# Altium PCB SeniorDesign.PcbDoc (part 2 of 2)
Units mil, origin at the board's own origin, x right, y up, seen from the top; angles counter-clockwise.
Board outline 3586 x 2237 mil, 4 copper layers (Top Layer, GND, PWR, Bottom Layer), stack 30.634 mil thick; 184 components, 148 nets, 619 pads, 132 vias.
Unrouted connection lines stored in the file: 8.
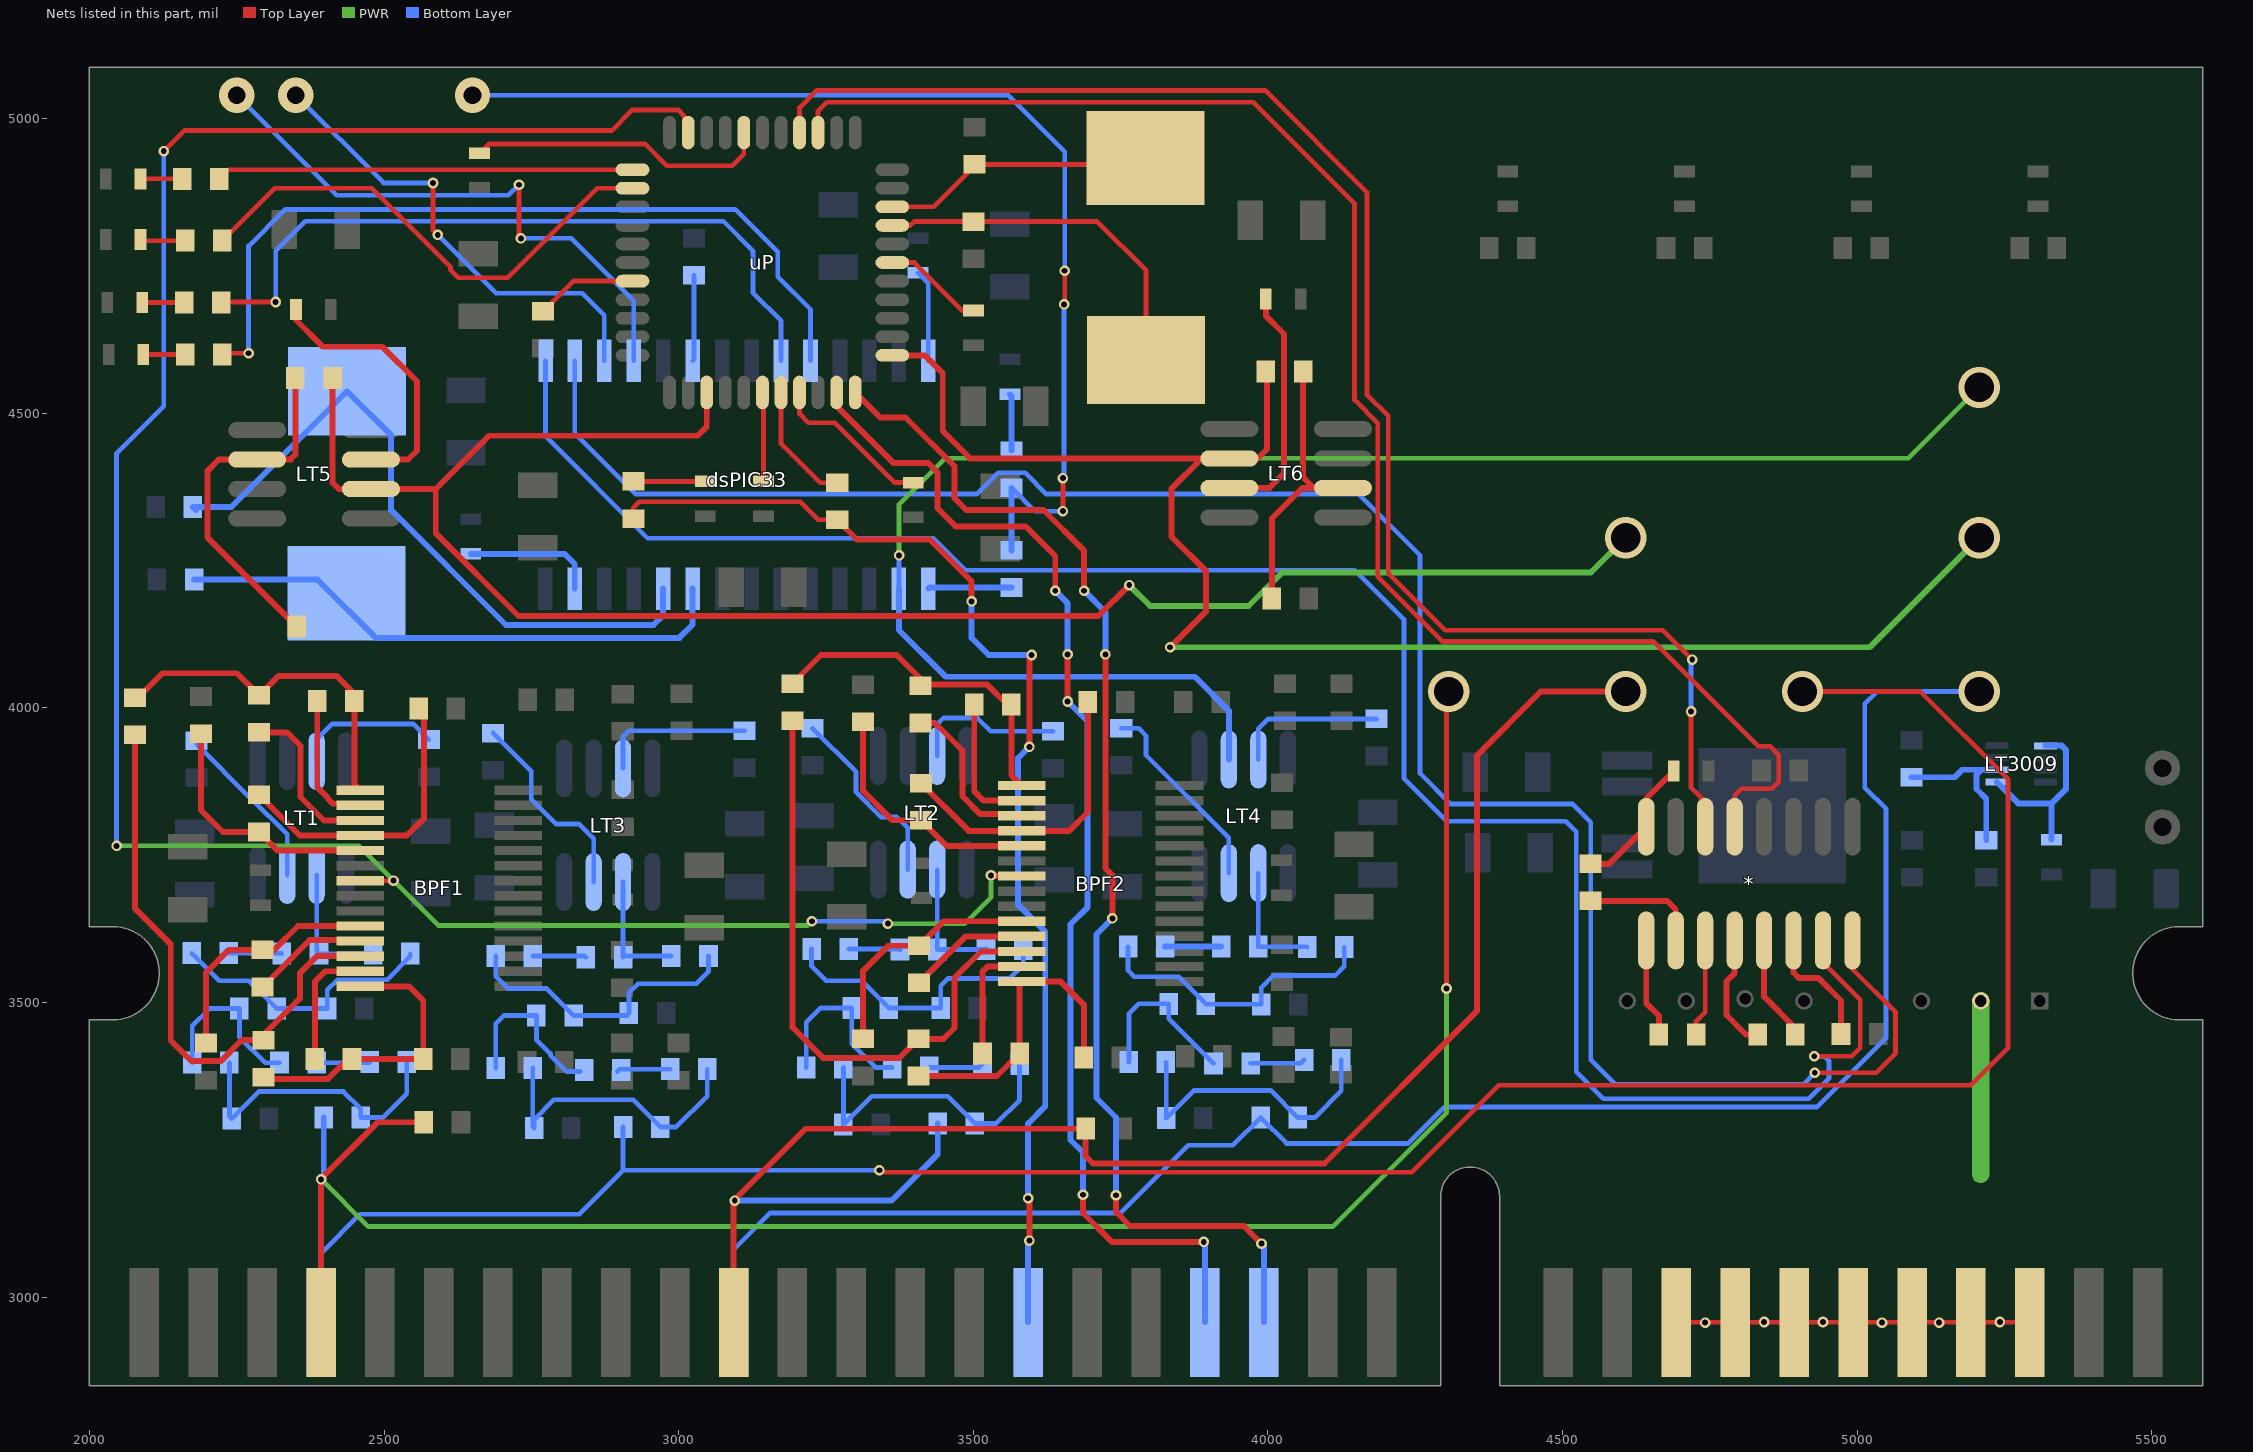
[diagram p4: the nets of this part, all layers, seen from the top]

## Via types
v1: diameter 18, hole 10, Top Layer to Bottom Layer, 107 vias
v2: diameter 70, hole 50, Top Layer to Bottom Layer, 20 vias
v3: diameter 60, hole 30, Top Layer to Bottom Layer, 5 vias

## Nets (pads, with @x,y where several pads share a name; then routed paths per layer and width w, separated by ;. In a path a pad name is that pad's centre, name@x,y a point inside that pad or via, vN(x,y) a via of type N, cw(c..) or ccw(c..) an arc to the next point about the centre after c; other vN are vias at no path point) (continued)
H4FILTEROUT: dsPIC33.2 LT4.6 | length 2828.3
  PWR w8: v1(3374,4259) 3374,4346 3452,4424 5087,4424 v2(5207,4544)
  Bottom Layer w8: dsPIC33.2@3373.62,4202.5 3374,4202.88 v1(3374,4259)
  Bottom Layer w10: dsPIC33.2@3373.62,4202.5 3373.62,4132.38 3453,4053 3876,4053 3933.59,3995.41 LT4.6@3933.59,3912.59
HYDROPHONE1: C14.2 pad.4 R37.1 | length 3304.4
  Top Layer w8: v1(4303,3524) 4303,4024 v2(4307,4028)
  Top Layer w10: pad.4@2393,2957.5 v1(2393,3200) 2393,3201 2489,3297 R37.1@2567.5,3297
  PWR w8: v1(2393,3200) 2473,3120 4110,3120 4303,3313 v1(4303,3524)
  Bottom Layer w10: v1(2393,3200) 2397.5,3204.5 C14.2@2397.5,3305
HYDROPHONE2: C21.2 pad.11 R40.1 | length 2838.2
  Top Layer w10: pad.11@3093,2957.5 3093,3164 3215,3286 R40.1@3690.5,3286 3690.5,3239.5 3703,3227 4096,3227 4355,3486 4355,3920 4463,4028 v2(4607,4028)
  Bottom Layer w10: v1(3095,3164) 3361,3164 3439.5,3242.5 C21.2@3439.5,3295
HYDROPHONE3: C28.2 pad.67 | length 4067.8
  Top Layer w8: v1(3340.5,3215.5) 3344,3212 4244,3212 4392,3360 5193,3360 5256,3423 5256,3879 5107,4028 v2(4907,4028)
  Bottom Layer w8: pad.67@2393,2957.5 2393,3075 2459,3141 2831,3141 2905.5,3215.5 ; C28.2@2905.5,3289 2905.5,3215.5 ; v1(3340.5,3215.5) 2905.5,3215.5
HYDROPHONE4: C35.2 pad.60 | length 3049.3
  Bottom Layer w8: pad.60@3093,2957.5 3093,3081 3155,3143 3750,3143 3865,3258 3940.5,3258 C35.2@3987.5,3305 4031.5,3261 4238,3261 4300,3323 4932,3323 5049,3440 5049,3829 5013,3865 5013,4007 5034,4028 v2(5207,4028)
"MCLR B_(DSPIC)": B2.1 R1.2 | length 97.2
  Bottom Layer w10: B2.1@3562,4532.47 3565,4529.47 R1.2@3565,4436.5
"MCLR B_PICK24": B13.1 R25.2 | length 122
  Top Layer w8: R25.2@2923,4384.5 B13.1@3045,4384.53
Net*_1: *.1 C3.1 | length 168.5
  Top Layer w10: *.1@4642,3605.54 4642,3499 4663.5,3477.5 C3.1@4663.5,3446
Net*_2: *.2 C1.1 | length 203.5
  Top Layer w10: C1.1@4547,3672.5 4677.5,3672.5 4692,3658 *.2@4692,3605.54
Net*_3: *.3 C3.2 | length 166
  Top Layer w8: C3.2@4726.5,3446 4726.5,3468.5 4742,3484 *.3@4742,3605.54
Net*_4: *.4 C4.1 | length 199.5
  Top Layer w10: *.4@4792,3605.54 4792,3550 4778,3536 4778,3479 4811,3446 C4.1@4831.5,3446
Net*_5: *.5 C4.2 | length 181.3
  Top Layer w10: *.5@4842,3605.54 4842,3510 4894.5,3457.5 C4.2@4894.5,3446
Net*_6: *.6 C5.2 | length 211.2
  Top Layer w10: *.6@4892,3605.54 4892,3551 4901,3542 4934,3542 4972.5,3503.5 C5.2@4972.5,3447
NetB3_2: B3.2 dsPIC33.28 | length 156.7
  Bottom Layer w8: B3.2@3406,4738.47 3423.62,4720.85 dsPIC33.28@3423.62,4589.12
NetB4_2: B4.2 dsPIC33.13 | length 225.6
  Bottom Layer w10: B4.2@2647,4261.47 2806.53,4261.47 2823.62,4244.38 dsPIC33.13@2823.62,4202.5
NetB5_2: B5.2 LT1.7 | length 249.3
  Bottom Layer w8: LT1.7@2385.59,3909.59 2385.59,3946.59 2412,3973 2549.5,3973 B5.2@2576,3946.5
NetB6_2: B6.2 LT1.3 | length 291.8
  Bottom Layer w8: B6.2@2182,3944.5 2182,3938.46 2274.08,3846.38 2274.62,3846.38 2335.59,3785.41 LT1.3@2335.59,3716.68
NetB7_2: B7.2 LT2.7 | length 264
  Bottom Layer w8: LT2.7@3438.59,3918.59 3438.59,3972.59 3449,3983 3507,3983 3529.5,3960.5 B7.2@3635,3960.5
NetB8_2: B8.2 LT2.3 | length 322.6
  Bottom Layer w8: B8.2@3227,3965.5 3301,3891.5 3301,3857 3343,3815 3370,3815 3388.59,3796.41 LT2.3@3388.59,3725.68
NetB9_2: B9.2 LT3.7 | length 264.5
  Bottom Layer w8: LT3.7@2905.59,3897.59 2905.59,3951.59 2915.5,3961.5 B9.2@3112,3961.5
NetB10_2: B10.2 LT3.3 | length 346.3
  Bottom Layer w8: B10.2@2685,3957.5 2749.5,3893 2749.5,3845.5 2792,3803 2831,3803 2855.59,3778.41 LT3.3@2855.59,3704.68
NetB11_2: B11.2 LT4.7 | length 259.4
  Bottom Layer w8: LT4.7@3983.59,3912.59 3983.59,3964.59 4000.5,3981.5 B11.2@4184,3981.5
NetB12_2: B12.2 LT4.3 | length 338.7
  Bottom Layer w8: B12.2@3751,3965.5 3780.5,3965.5 3793,3953 3793,3920 3933.59,3779.41 LT4.3@3933.59,3719.68
NetB22_2: B22.2 LT5.7 | length 468.1
  Top Layer w10: B22.2@2350.47,4676 2350.47,4658.53 2396,4613 2497,4613 2556,4554 2556,4437 2540.59,4421.59 LT5.7@2477.59,4421.59
NetB23_2: B23.2 LT6.7 | length 411.6
  Top Layer w10: LT6.7@3934.41,4373.41 4002.41,4373.41 4027.25,4398.25 4027.25,4634.75 3996.47,4665.53 B23.2@3996.47,4694
NetB24_2: B24.2 LT3009.1 LT3009.5 | length 308
  Bottom Layer w10: LT3009.5@5237.06,3874.25 5273.16,3838.15 5330,3838.15 ; LT3009.1@5319.34,3936.14 5346.86,3936.14 5354.02,3928.98 5354.02,3862.17 5330,3838.15 ; B24.2@5330,3776.53 5330,3838.15
NetBPF1_15: BPF1.15 R31.2 R60.2 R64.2 | length 599.3
  Top Layer w10: R31.2@2077,4017.5 2082.5,4017.5 2124,4059 2250.5,4059 R60.2@2288,4021.5 2320.5,4054 2420,4054 2449.5,4024.5 R64.2@2449.5,4012 2449.5,3870.51 BPF1.15@2459.67,3860.34
NetBPF1_16: BPF1.16 R64.1 | length 233.2
  Top Layer w10: R64.1@2386.5,4012 2386.5,3865.5 2404.32,3847.68 2404.32,3846.25 2413.1,3837.46 2456.95,3837.46 BPF1.16@2459.67,3834.75
NetBPF1_17: BPF1.17 R60.1 | length 284.5
  Top Layer w10: R60.1@2288,3958.5 2335.5,3958.5 2358,3936 2358,3849 2397.84,3809.16 BPF1.17@2459.67,3809.16
NetBPF1_18: BPF1.18 R55.2 R67.2 | length 510.7
  Top Layer w10: R55.2@2288,3852.5 2356.93,3783.57 BPF1.18@2459.67,3783.57 2538.57,3783.57 2568,3813 2568,3989.5 R67.2@2558.5,3999
NetBPF1_19: BPF1.19 R53.1 R55.1 | length 428.8
  Top Layer w10: R53.1@2189,3956.5 2189,3827 2226.5,3789.5 R55.1@2288,3789.5 2319.53,3757.98 BPF1.19@2459.67,3757.98
NetBPF1_24: BPF1.24 R44.2 R48.1 | length 413.9
  Top Layer w10: R48.1@2198,3431.5 2198,3551 2236.5,3589.5 R44.2@2294,3589.5 2313.5,3589.5 2354.02,3630.02 BPF1.24@2459.67,3630.02
NetBPF1_25: BPF1.25 R44.1 | length 199.2
  Top Layer w10: R44.1@2294,3526.5 2373.5,3606 2458.1,3606 BPF1.25@2459.67,3604.43
NetBPF1_26: BPF1.26 R31.1 R39.1 | length 984.1
  Top Layer w10: R31.1@2077,3954.5 2077,3660 2138,3599 2138,3435.83 2173.09,3400.75 2222.91,3400.75 2258.66,3436.5 R39.1@2295,3436.5 2295,3445 2357,3507 2357,3550 2385.84,3578.84 BPF1.26@2459.67,3578.84
NetBPF1_27: BPF1.27 R34.1 | length 216
  Top Layer w10: R34.1@2382.5,3404 2382.5,3535.5 2400.25,3553.25 BPF1.27@2459.67,3553.25
NetBPF1_28: BPF1.28 R29.2 R34.2 R39.2 | length 503.1
  Top Layer w10: R39.2@2295,3373.5 2298.2,3370.3 2404.47,3370.3 2438.17,3404 R34.2@2445.5,3404 R29.2@2566.5,3404 2566.5,3503.5 2542.34,3527.66 BPF1.28@2459.67,3527.66
NetBPF2_15: BPF2.15 R32.2 R62.2 R66.2 | length 580.5
  Top Layer w10: R32.2@3193,4041.5 3241.5,4090 3370,4090 3410,4050 R62.2@3410,4037.5 3412.21,4039.7 3523.46,4039.7 3557.17,4006 R66.2@3564.5,4006 3564.5,3885.99 BPF2.15@3582.14,3868.34
NetBPF2_16: BPF2.16 R66.1 | length 234.7
  Top Layer w10: R66.1@3501.5,4006 3501.5,3858.5 3517.25,3842.75 BPF2.16@3582.14,3842.75
NetBPF2_17: BPF2.17 R62.1 | length 282.9
  Top Layer w10: R62.1@3410,3974.5 3435,3974.5 3481.5,3928 3481.5,3850.21 3511.84,3819.87 3579.43,3819.87 BPF2.17@3582.14,3817.16
NetBPF2_18: BPF2.18 R56.2 R68.2 | length 516.7
  Top Layer w10: R56.2@3411,3872.5 3491.93,3791.57 BPF2.18@3582.14,3791.57 3662.57,3791.57 3694.5,3823.5 R68.2@3694.5,4010
NetBPF2_19: BPF2.19 R54.1 R56.1 | length 425.2
  Top Layer w10: R54.1@3313,3976.5 3313,3859 3362.5,3809.5 R56.1@3411,3809.5 3454.53,3765.98 BPF2.19@3582.14,3765.98
NetBPF2_24: BPF2.24 R46.2 R50.1 | length 419.4
  Top Layer w10: R50.1@3313,3438.5 3313,3554 3355.5,3596.5 R46.2@3408,3596.5 3449.53,3638.02 BPF2.24@3582.14,3638.02
NetBPF2_25: BPF2.25 R46.1 | length 206.8
  Top Layer w10: R46.1@3408,3533.5 3486.93,3612.43 BPF2.25@3582.14,3612.43
NetBPF2_26: BPF2.26 R32.1 R42.1 | length 1055.9
  Top Layer w10: R32.1@3193,3978.5 3193,3458 3244.75,3406.25 3337.91,3406.25 3338.17,3406 3374.5,3406 R42.1@3407,3438.5 3449.5,3438.5 3468,3457 3468,3542 3512.84,3586.84 BPF2.26@3582.14,3586.84
NetBPF2_27: BPF2.27 R36.1 | length 208.8
  Top Layer w10: R36.1@3515.5,3414 3515.5,3552.5 3524.25,3561.25 BPF2.27@3582.14,3561.25
NetBPF2_28: BPF2.28 R30.2 R36.2 R42.2 | length 521.7
  Top Layer w10: R42.2@3407,3375.5 3540,3375.5 R36.2@3578.5,3414 3578.5,3532.02 BPF2.28@3582.14,3535.66 3648.34,3535.66 3687.5,3496.5 R30.2@3687.5,3407
NetC8_2: C8.2 dsPIC33.10 Y1.1 | length 1176.7
  Bottom Layer w10: C8.2@2180.47,4336.02 C8.2@2175.5,4341 2240.74,4341 Y1.1@2437.18,4537.44 2511.98,4462.65 2511.98,4336.02 2707,4141 2957,4141 2973.62,4157.62 dsPIC33.10@2973.62,4202.5
NetC9_2: C9.2 dsPIC33.9 Y1.2 | length 957.4
  Bottom Layer w10: C9.2@2177.5,4218 2386.97,4218 2391,4213.98 2485.98,4119 3001,4119 3023.62,4141.62 dsPIC33.9@3023.62,4202.5
NetC10_1: C10.1 dsPIC33.20 | length 146.4
  Bottom Layer w8: dsPIC33.20@3023.62,4589.12 3026,4591.5 C10.1@3026,4734.5
NetC12_1: C12.1 R6.2 | length 90.4
  Bottom Layer w8: R6.2@2385.5,3398 2474.5,3398 C12.1@2475.5,3399
NetC12_2: C12.2 C14.1 C15.2 R9.2 | length 509.7
  Bottom Layer w8: C15.2@2237.5,3398 2237.5,3307.01 R9.2@2241.5,3303 2287.5,3349 2431,3349 2460.5,3319.5 C14.1@2460.5,3305 2498,3305 2538.5,3345.5 C12.2@2538.5,3399
NetC13_1: C13.1 LT1.2 R8.2 | length 227.3
  Bottom Layer w8: LT1.2@2385.59,3716.68 2385.59,3586.91 C13.1@2389.5,3583 R8.2@2481.5,3583
NetC13_2: C13.2 R5.2 | length 90.4
  Bottom Layer w8: R5.2@2236.5,3584 2325.5,3584 C13.2@2326.5,3583
NetC15_1: C15.1 R6.1 R7.1 | length 289.2
  Bottom Layer w8: C15.1@2174.5,3398 2174.5,3460.5 2204,3490 R7.1@2254.5,3490 2254.5,3441.5 2298,3398 R6.1@2322.5,3398
NetC17_2: C17.2 R5.1 R7.2 R8.1 | length 469.5
  Bottom Layer w8: R5.1@2173.5,3584 2220.5,3537 2270.5,3537 R7.2@2317.5,3490 C17.2@2403.5,3490 2403.5,3521.5 2421,3539 2505,3539 2544.5,3578.5 R8.1@2544.5,3583
NetC19_1: C19.1 R11.2 | length 92.5
  Bottom Layer w8: R11.2@3425.5,3390 3509.5,3390 C19.1@3515.5,3396
NetC19_2: C19.2 C21.1 C22.2 R14.2 | length 512.8
  Bottom Layer w8: C22.2@3279.5,3390 R14.2@3279.5,3293 3327.5,3341 3456.5,3341 C21.1@3502.5,3295 3539,3295 3578.5,3334.5 C19.2@3578.5,3396
NetC20_1: C20.1 LT2.2 R13.2 | length 218.9
  Bottom Layer w8: LT2.2@3438.59,3725.68 3438.59,3590.09 3520.6,3590.09 R13.2@3521.5,3591
NetC20_2: C20.2 R10.2 | length 87.4
  Bottom Layer w8: R10.2@3288.5,3591 3374.5,3591 C20.2@3375.5,3590
NetC22_1: C22.1 R11.1 R12.1 | length 309.9
  Bottom Layer w8: C22.1@3216.5,3390 3216.5,3466.5 3241,3491 R12.1@3293.5,3491 3293.5,3430.5 3334,3390 R11.1@3362.5,3390
NetC24_2: C24.2 R10.1 R12.2 R13.1 | length 497.2
  Bottom Layer w8: R10.1@3225.5,3591 3225.5,3561.5 3250,3537 3310.5,3537 R12.2@3356.5,3491 C24.2@3444.5,3491 3444.5,3528.5 3457,3541 3562,3541 3584.5,3563.5 R13.1@3584.5,3591
NetC26_1: C26.1 R16.2 | length 91.7
  Bottom Layer w8: R16.2@2895.5,3383 2899.5,3387 C26.1@2985.5,3387
NetC26_2: C26.2 C28.1 C29.2 R19.2 | length 511.5
  Bottom Layer w8: C29.2@2752.5,3389 2752.5,3289.01 R19.2@2754.5,3287 2754.5,3301.5 2788,3335 2922.5,3335 C28.1@2968.5,3289 2996,3289 3048.5,3341.5 C26.2@3048.5,3387
NetC27_1: C27.1 LT3.2 R18.2 | length 210.6
  Bottom Layer w8: LT3.2@2905.59,3704.68 2905.5,3704.58 C27.1@2905.5,3577 2907.5,3579 R18.2@2987.5,3579
NetC27_2: C27.2 R15.2 | length 90.8
  Bottom Layer w8: R15.2@2752.5,3579 2840.5,3579 C27.2@2842.5,3577
NetC29_1: C29.1 R16.1 R17.1 | length 288.9
  Bottom Layer w8: C29.1@2689.5,3389 2689.5,3464.5 2703,3478 R17.1@2758.5,3478 2758.5,3437.24 2782.24,3413.5 2782.24,3410.76 2810,3383 R16.1@2832.5,3383
NetC31_2: C31.2 R15.1 R17.2 R18.1 | length 500.6
  Bottom Layer w8: R15.1@2689.5,3579 2689.5,3544.5 2710,3524 2775.5,3524 R17.2@2821.5,3478 2911.5,3478 C31.2@2915.5,3482 2915.5,3516.5 2931,3532 3030,3532 3050.5,3552.5 R18.1@3050.5,3579
NetC33_1: C33.1 R21.2 | length 93.5
  Bottom Layer w8: R21.2@3970.5,3397 4055.5,3397 C33.1@4061.5,3403
NetC33_2: C33.2 C35.1 C36.2 R24.2 | length 502.3
  Bottom Layer w8: C36.2@3826.5,3399 3827.5,3397.99 R24.2@3827.5,3304 3874.5,3351 4004.5,3351 C35.1@4050.5,3305 4079,3305 4124.5,3350.5 C33.2@4124.5,3403
NetC34_1: C34.1 LT4.2 R23.2 | length 208.1
  Bottom Layer w8: LT4.2@3983.59,3719.68 3983.59,3595.09 C34.1@3983.5,3595 4065.5,3595 R23.2@4066.5,3594
NetC34_2: C34.2 R20.2 | length 95
  Bottom Layer w10: R20.2@3825.5,3595 C34.2@3920.5,3595
NetC36_1: C36.1 R21.1 R22.1 | length 289.2
  Bottom Layer w8: C36.1@3763.5,3399 3764,3399.5 3764,3481 3781,3498 R22.1@3831.5,3498 3831.5,3473 R21.1@3907.5,3397
NetC38_2: C38.2 R20.1 R22.2 R23.1 | length 507.2
  Bottom Layer w8: R20.1@3762.5,3595 3762.5,3554.5 3773,3544 3848.5,3544 R22.2@3894.5,3498 3895.5,3497 C38.2@3988.5,3497 3988.5,3525.5 4009,3546 4114,3546 4129.5,3561.5 R23.1@4129.5,3594
NetC41_2: C41.2 uP.30 Y2.1 | length 619.9
  Top Layer w8: uP.30@3362.47,4818.99 3392.99,4818.99 3399.5,4825.5 C41.2@3500,4825.5 3710.48,4825.5 3793.18,4742.79 Y2.1@3793.18,4590.56
NetC42_2: C42.2 uP.31 Y2.2 | length 392.3
  Top Layer w8: uP.31@3362.47,4850.49 3432.49,4850.49 3502,4920 C42.2@3502,4922.5 3694.48,4922.5 Y2.2@3715,4943.02
NetC44_1: C44.1 uP.7 | length 172.7
  Top Layer w8: C44.1@2770,4673.5 2821.01,4724.5 uP.7@2921.53,4724.5
NetD1_1: D1.1 R3.1 | length 71
  Top Layer w8: D1.1@2091.53,4600 R3.1@2162.5,4600
NetD2_1: D2.1 R4.1 | length 71
  Top Layer w8: D2.1@2089.53,4688 R4.1@2160.5,4688
NetD3_1: D3.1 R27.1 | length 71
  Top Layer w8: D3.1@2086.53,4898 R27.1@2157.5,4898
NetD4_1: D4.1 R28.1 | length 74
  Top Layer w8: D4.1@2088.53,4793 R28.1@2162.5,4793
NetD5_1: 
NetD6_1: 
NetD7_2: 
NetD8_1: 
NetdsPIC33_1: dsPIC33.1@3423.62,4202.5 R2.2 | length 142.2
  Bottom Layer w10: dsPIC33.1@3423.62,4202.5 3425.62,4204.5 R2.2@3565,4204.5
NetdsPIC33_23: dsPIC33.23 R4.2 | length 1236.5
  Top Layer w8: R4.2@2224.5,4689 v1(2316,4689)
  Bottom Layer w8: v1(2316,4689) 2316,4776 2366,4826 3076,4826 3126,4776 3126,4705 3173.62,4657.38 dsPIC33.23@3173.62,4589.12
NetdsPIC33_24: dsPIC33.24 R3.2 | length 1388.8
  Top Layer w8: R3.2@2225.5,4600 2227.5,4602 v1(2270,4602)
  Bottom Layer w8: v1(2270,4602) 2270,4784 2332,4846 3096,4846 3168,4774 3168,4732 3223.62,4676.38 dsPIC33.24@3223.62,4589.12
NetLT5_2: LT5.2 R69.2 R70.1 | length 619.4
  Top Layer w10: 2342.41,4421.59 2340.59,4421.59 ; R70.1@2349.5,4560 2349.5,4430.5 2340.59,4421.59 ; R69.2@2351.5,4138 2200,4289.5 2200,4402 2219.59,4421.59 LT5.2@2284.68,4421.59 2340.59,4421.59
NetLT6_2: LT6.2 R71.2 R72.1 | length 482.9
  Top Layer w10: R71.2@4006.5,4186 4006.5,4321.5 4058.41,4373.41 4077.58,4373.41 ; R72.1@4059.5,4571 4059.5,4391.5 4077.58,4373.41 ; LT6.2@4127.32,4373.41 4077.58,4373.41
NetLT3009_6: LT3009.6 R77.1 R78.2 | length 280.3
  Bottom Layer w10: R77.1@5092,3882.5 5165.5,3882.5 5178.16,3895.16 LT3009.6@5237.06,3895.16 ; 5210.72,3895.16 5202.37,3886.8 5202.37,3862.57 5219,3845.94 R78.2@5219,3775.5
NetR26_2: R26.2 uP.18 | length 209.6
  Top Layer w8: uP.18@3173.5,4535.53 3173.5,4449 3240,4382.5 R26.2@3269,4382.5
NetR27_2: R27.2 uP.1 | length 707.4
  Top Layer w8: R27.2@2220.5,4898 2235.98,4913.48 uP.1@2921.53,4913.48
NetR28_2: R28.2 uP.2 | length 861.6
  Top Layer w8: R28.2@2225.5,4793 2314.5,4882 2479,4882 2612.54,4748.46 2612.54,4743.7 2626.23,4730 2710,4730 2861.98,4881.98 uP.2@2921.53,4881.98
"P17 B": B17.2 uP.17 | length 151.8
  Top Layer w8: uP.17@3142,4535.53 3142,4518 3144,4516 B17.2@3144,4384.53
"P19 B": B14.1 uP.19 | length 277.8
  Top Layer w8: uP.19@3204.99,4535.53 3204.99,4499.01 3220,4484 3265,4484 3366.47,4382.53 B14.1@3398,4382.53
"P28 B": B15.2 uP.28 | length 171.3
  Top Layer w8: uP.28@3362.47,4756 3400,4756 3481.47,4674.53 B15.2@3500,4674.53
"P40 B": B16.2 uP.40 | length 515.2
  Top Layer w8: B16.2@2662,4941.53 2677.47,4957 2744.25,4957 2744.5,4957.25 2942.75,4957.25 2980,4920 3090.5,4920 3110.5,4940 uP.40@3110.5,4976.47
"PICKIT PGC (DSPIC)": dsPIC33.18 | length 986.7
  Top Layer w8: v1(2729,4888) 2729,4800 v1(2732,4797)
  Bottom Layer w8: v3(2250,5040) 2420,4870 2711,4870 v1(2729,4888) ; v1(2732,4797) 2818,4797 2923.62,4691.38 dsPIC33.18@2923.62,4589.12
"PICKIT PGC (PIC24)": pad.51 uP.22 | length 2102.6
  Top Layer w10: uP.22@3299.48,4535.53 3342.01,4493 3385,4493 3468,4410 3468,4356 3488,4336 3619,4336 3688,4267 v1(3688,4199) ; v1(3724,4091) 3724,3728 3736,3716 v1(3736,3643) ; v1(3742,3173) 3742,3145 3766,3121 3959,3121 v1(3989,3091)
  Bottom Layer w10: v1(3688,4199) 3724,4163 v1(3724,4091) ; v1(3736,3643) 3709,3616 3709,3338 3742,3305 v1(3742,3173) ; v1(3989,3091) 3993,3087 pad.51@3993,2957.5
"PICKIT PGD (DSPIC)": dsPIC33.17 | length 802.5
  Top Layer w8: v1(2583,4891) 2583,4811 v1(2591,4803)
  Bottom Layer w8: v3(2350,5040) 2499,4891 v1(2583,4891) ; v1(2591,4803) 2690,4704 2836,4704 2873.62,4666.38 dsPIC33.17@2873.62,4589.12
"PICKIT PGD (PIC24)": pad.52 uP.21 | length 2056.6
  Top Layer w10: uP.21@3267.98,4535.53 3267.98,4512.02 3364,4416 3423,4416 3439,4400 3439,4339 3470,4308 3589,4308 3639,4258 v1(3639,4199) ; v1(3660,4011) v1(3660,4091) ; v1(3686,3174) 3686,3143 3735,3094 v1(3891,3094)
  Bottom Layer w10: v1(3639,4199) 3660,4178 v1(3660,4091) ; v1(3660,4011) 3694,3977 3694,3662 3665,3633 3665,3267 3686,3246 v1(3686,3174) ; v1(3891,3094) 3893,3092 pad.52@3893,2957.5
PIN16: *.16 B1.2 C1.2 | length 234.9
  Top Layer w10: C1.2@4547,3735.5 4579.04,3735.5 *.16@4642,3798.46 4642,3846.53 B1.2@4688.47,3893
PWM: BPF1.21 BPF2.21 uP.43 | length 3869.1
  Top Layer w8: v1(2126,4945) 2161,4980 2886,4980 2921.02,5015.02 2998.8,5015.02 3009.35,5004.47 3009.35,4983.14 uP.43@3016.02,4976.47 ; BPF1.21@2459.67,3706.8 2459.87,3707 v1(2516,3707)
  Top Layer w10: v1(3530,3716) 3531.2,3714.8 BPF2.21@3582.14,3714.8 BPF2.21@3582.35,3715
  PWR w8: v1(2046,3766) 2457,3766 v1(2516,3707) 2592,3631 3219,3631 v1(3226,3638) ; v1(3355,3634) 3485,3634 3530,3679 v1(3530,3716)
  Bottom Layer w8: v1(2046,3766) 2046,4432 2126,4512 v1(2126,4945) ; v1(3226,3638) 3351,3638 v1(3355,3634)
RECTOUT1: LT5.6 R70.2 uP.14 | length 3156.2
  Top Layer w10: R70.2@2412.5,4560 2412.5,4382.5 2423.41,4371.59 LT5.6@2477.59,4371.59 2587.59,4371.59 ; uP.14@3047.51,4535.53 3047.51,4477.51 3032,4462 2678,4462 2587.59,4371.59 ; v1(3764.5,4208.5) 3712,4156 2728,4156 2587.59,4296.41 2587.59,4371.59
  PWR w10: v1(3764.5,4208.5) 3800,4173 3967,4173 4024,4230 4548,4230 v2(4607,4289)
RECTOUT2: LT6.6 R72.2 uP.23 | length 2746.5
  Top Layer w10: uP.23@3362.47,4598.52 3417.48,4598.52 3448,4568 3448,4470 3494.59,4423.41 LT6.6@3887.41,4423.41 ; v1(3834,4103) 3895,4164 3895,4232 3836,4291 3836,4372 LT6.6@3887.41,4423.41 ; R72.2@3996.5,4571 3998.62,4568.88 3998.62,4439.62 3982.41,4423.41 LT6.6@3934.41,4423.41 LT6.6@3887.41,4423.41
  PWR w10: v1(3834,4103) 5021,4103 v2(5207,4289)
"USART RX (DSPIC)": *.7 dsPIC33.15 | length 3533.1
  Top Layer w8: v1(4927,3409) 4991,3409 5005,3423 5005,3505 4942,3568 *.7@4942,3605.54
  Bottom Layer w8: dsPIC33.15@2774.02,4589.12 2774.02,4460.98 2947,4288 3432,4288 3486,4234 4147,4234 4231,4150 4231,3880 4303,3808 4505,3808 4523,3790 4523,3383 4569,3337 4918,3337 4952,3371 4952,3401 4944,3409 v1(4927,3409)
"USART RX (PIC24)": *.14 uP.37 | length 2621.3
  Top Layer w8: uP.37@3204.99,4976.47 3204.99,5018.99 3234,5048 3995,5048 4168,4875 4168,4532 4204,4496 4204,4229 4301,4132 4670,4132 v1(4720,4082) ; v1(4718,3994) 4718,3865 4742,3841 *.14@4742,3798.46
  Bottom Layer w8: v1(4718,3994) 4718,4080 v1(4720,4082)
"USART TX (DSPIC)": *.8 dsPIC33.16 | length 3548.6
  Top Layer w8: v1(4928,3381) 5032,3381 5065,3414 5065,3484 4992,3557 *.8@4992,3605.54
  Bottom Layer w8: dsPIC33.16@2823.62,4589.12 2823.62,4466.38 2927,4363 3505.9,4363 3542.16,4399.25 3587.84,4399.25 3624.1,4363 4154,4363 4258,4259 4258,3889 4310,3837 4517,3837 4548,3806 4548,3403 4590,3361 4908,3361 v1(4928,3381)
"USART TX (PIC24)": *.13 uP.36 | length 2663.6
  Top Layer w8: uP.36@3236.49,4976.47 3236.49,5013.49 3251,5028 3975,5028 4147,4856 4147,4522.79 4186.53,4483.26 4186.53,4222.47 4296,4113 4654,4113 4832,3935 4852,3935 4867,3920 4867,3874.91 4855.09,3863 4803,3863 4792,3852 *.13@4792,3798.46
VCC: ?.2@5209.76,3502.73 pad.27 pad.28 pad.29 pad.30 pad.31 pad.32 pad.33 | length 906.4
  Top Layer w8: pad.27@4693,2957.5 pad.28@4793,2957.5 pad.29@4893,2957.5 pad.30@4993,2957.5 pad.31@5093,2957.5 pad.32@5193,2957.5 pad.33@5293,2957.5
  PWR w8: 5201,3200 5209.76,3208.76
  PWR w30: 5209.76,3208.76 ?.2@5209.76,3502.73
  other v1: 4742,2957 5042,2957 5139,2957 4842,2958 4942,2958 5242,2958
VPP/MCLR(DSPIC): R1.1 R2.1 | length 1865.4
  Top Layer w8: v1(3652,4334) v1(3652,4390) ; v1(3654,4685) 3655,4686 v1(3655,4742)
  Bottom Layer w8: v3(2650,5040) 3559,5040 3655,4944 v1(3655,4742) ; R1.1@3565,4373.5 3604.5,4334 v1(3652,4334) ; v1(3652,4390) 3654,4392 v1(3654,4685)
  Bottom Layer w10: R2.1@3565,4267.5 R1.1@3565,4373.5
VPP/MCLR(PIC24): pad.55 R25.1 R26.1 | length 2034.5
  Top Layer w8: R25.1@2923,4321.5 2923,4340 2933,4350 3206,4350 3236.5,4319.5 R26.1@3269,4319.5
  Top Layer w10: R26.1@3269,4319.5 3302.5,4286 3426,4286 3497,4215 v1(3497,4181) ; v1(3595,3096) v1@3595,3166 ; v1(3595,3934) 3595,4086 v1(3599,4090)
  Bottom Layer w10: v1(3497,4181) 3497,4119 3526,4090 v1(3599,4090) ; pad.55@3593,2957.5 3593,3094 v1(3595,3096) ; v1(3593,3168) 3593,3295 3622,3324 3622,3620 3576,3666 3576,3915 v1(3595,3934)
pads on no net: ?.2@4909.76,3502.73 ?.2@5108.97,3502.73 D5_1.1 D5_1.2 D6_1.1 D6_1.2 D7_1.1 D7_1.2 D8_1.1 D8_1.2 dsPIC33.1@3457.87,4185.18 dsPIC33.6 dsPIC33.7 dsPIC33.11 dsPIC33.12 dsPIC33.14 dsPIC33.21 dsPIC33.22 dsPIC33.25 dsPIC33.26 LT1.1 LT1.5 LT1.8 LT2.1 LT2.5 LT2.8 LT3.1 LT3.5 LT3.8 LT4.1 LT4.5 LT4.8 LT5.1 LT5.5 LT5.8 LT6.1 LT6.5 LT6.8 LT3009.8 R73_1.1 R73_1.2 R74_1.1 R74_1.2 R75_1.1 R75_1.2 R76_1.1 R76_1.2 uP.3 uP.4 uP.5 uP.8 uP.9 uP.10 uP.11 uP.12 uP.13 uP.15 uP.24 uP.25 uP.26 uP.27 uP.32 uP.33 uP.34 uP.38 uP.41 uP.42 uP.44

## Polygon pours and split planes (outlines as drawn)
"3.3 V" on PWR "Top Layer-No Net" (solid, pour order 22): 4099,5076.8 4099.2,5077 4986,5077 4986,4810 4983.97,4808 4981.95,4806 4832.09,4806 4832.09,4952 4829.05,4955 4100.01,4955
"1.65 V" on PWR "Top Layer-No Net" (solid, pour order 21): 2253,3990 2253,3274 2250,3271 2252.54,3273.54 4863.99,3273.54 4863.99,3933.01 4863,3934 4865,3936 5585,3936 5585,3630 5586,3629 5584.86,3627.86 5531.01,3627.86 5514.25,3627.86 5502.4,3616 5486.51,3600.12 5485.43,3600.12 5485.43,3595.84 5476.83,3587.24 5468.64,3579.05 5468.64,3565.49 5468.64,3534.51 5476.83,3526.33 5476.83,3512.76 5476.83,3507.41 5490.37,3493.87 5503.91,3480.33 5509.26,3480.33 5522.83,3480.33 5531.01,3472.14 5532.16,3471 5552,3471 5586,3471 5586,3233 2131,3233 2130,3234 2064,3234 2064,3471 2065,3472 2086.87,3493.87 2095.63,3493.87 2095.63,3499.22 2109.17,3512.76 2118.12,3521.71 2118.12,3542.26 2118.12,3569.91 2115.1,3572.93 2102,3586.03 2102,3596 2102,3597.61 2083.6,3616 2075.61,3624 2057,3624 2024.75,3624 2019.75,3629 2000,3629 2000,3988 2002,3990
"-5 V" on PWR "Top Layer-No Net" (solid, pour order 20): 4662.66,3636.21 4665.67,3633.22 4665.67,3272 2230.01,3272 2229,3271 2232.03,3274 2232.03,3629.06
"3.3 V" on PWR "Top Layer-No Net" (solid, pour order 19): 4105,4147 4105,3935 4184.89,3894 5582,3894 5582,4147
"+5 V" on PWR "Top Layer-No Net" (solid, pour order 18): 4863,3636.41 4650.79,3636.41 4648,3639 4647,3638.07 4647,3296 4864,3296
"1.65 V" on PWR "Top Layer-No Net" (solid, pour order 17): 2000,4036 2001,4037 4110,4037 4110,3934 4109,3935 2001,3935
"+5 V" on PWR "Top Layer-No Net" (solid, pour order 16): 2254,3934 2254,3629 4856.82,3629 4863,3632.74 4863,3934
"3.3 V" on PWR "Top Layer-No Net" (solid, pour order 15): 2000.22,5087 2000.22,4039 1998,4037 4110,4037 4110,5085
VCC on PWR "Top Layer-No Net" (solid, pour order 25): 4646,2850 4645,2851.27 4645,3231 5335,3231 5335,2850
GND on GND "Top Layer-No Net" (solid, pour order 12): 5586,5087 5586,3629 5582,3633 5537,3633 5524,3633 5460,3569 5459,3568 5459,3524 5459,3518 5499,3478 5512,3465 5532,3465 5580,3465 5586,3471 5586,2850 4393,2850 4391.71,2851.29 4391.71,3184.05 4391.71,3198.29 4364,3226 4363,3225 4324,3225 4319,3225 4296,3202 4293.43,3199.43 4293.43,3177.53 4293.43,2850.43 4293,2850 2000,2850 2000,3471 2001.14,3472.14 2054.99,3472.14 2072.83,3472.14 2089.62,3488.93 2115.1,3514.41 2115.1,3527.07 2115.1,3578.12 2112.84,3580.38 2095.63,3597.59 2095.63,3606.13 2090.28,3606.13 2076.74,3619.67 2068.55,3627.86 2054.99,3627.86 2001.14,3627.86 2000,3629 2000,5087
GND on Top Layer "Top Layer-No Net" (solid, pour order 13): 5586,5087 5586,3629 5582,3633 5537,3633 5524,3633 5460,3569 5459,3568 5459,3524 5459,3518 5499,3478 5512,3465 5532,3465 5580,3465 5586,3471 5586,2850 4393,2850 4391.71,2851.29 4391.71,3184.05 4391.71,3198.29 4364,3226 4363,3225 4324,3225 4319,3225 4296,3202 4293.43,3199.43 4293.43,3177.53 4293.43,2850.43 4293,2850 2000,2850 2000,3471 2001.14,3472.14 2054.99,3472.14 2072.83,3472.14 2089.62,3488.93 2115.1,3514.41 2115.1,3527.07 2115.1,3578.12 2112.84,3580.38 2095.63,3597.59 2095.63,3606.13 2090.28,3606.13 2076.74,3619.67 2068.56,3627.86 2054.99,3627.86 2001.14,3627.86 2000,3629 2000,5087
GND on Bottom Layer "Top Layer-No Net" (solid, pour order 14): 5586,5090.27 5586,3632.27 5582,3636.27 5537,3636.27 5524,3636.27 5460,3572.27 5459,3571.27 5459,3527.27 5459,3521.27 5499,3481.27 5512,3468.27 5532,3468.27 5580,3468.27 5586,3474.27 5586,2853.27 4393,2853.27 4391.71,2854.55 4391.71,3187.32 4391.71,3201.55 4364,3229.27 4363,3228.27 4324,3228.27 4319,3228.27 4296,3205.27 4293.43,3202.69 4293.43,3180.79 4293.43,2853.69 4293,2853.27 2000,2853.27 2000,3474.27 2001.14,3475.41 2054.99,3475.41 2072.83,3475.41 2089.62,3492.2 2115.1,3517.68 2115.1,3530.33 2115.1,3581.39 2112.84,3583.64 2095.63,3600.85 2095.63,3609.4 2090.28,3609.4 2076.74,3622.94 2068.56,3631.12 2054.99,3631.12 2001.14,3631.12 2000,3632.27 2000,5090.27

## Keep-outs
Keep-Out Layer:
  the board outline again, w8

## Silkscreen, mask and mechanical layers (free items; w line width, h text height)
Top Overlay:
  lines w8: 2065,3250 5520,3250
  lines w10: 2065,3060 2065,3460 ; 5520,3060 5520,3460 ; 4251,4790 4251,4999 4307,5055 5507,5055 5507,5054 5565,4996 5565,4792 5507,4734 4307,4734 4251,4790 ; 4254,4524 4254,4663 4307,4716 4307,4717 5507,4717 5507,4715 5557,4665 5557,4521 5507,4471 4307,4471 4254,4524 ; 4257,4259 4257,4405 4307,4455 4307,4456 5507,4456 5507,4454 5555,4406 5555,4257 5507,4209 4307,4209 4257,4259 ; 4260,3995 4260,4149 4306,4195 4307,4195 5507,4195 5555,4147 5555,3996 5507,3948 4307,3948 4260,3995
  text "Power Bank" at 4812,5004 h30
  text "dsPIC" at 2057,4982 h30
  text "PICKIT" at 2375,4968 h30
  text "3.3 V" at 4891,4937 h30
  text "-5 V" at 4594,4935 h30
  text "+5 V" at 4290,4934 h30
  text "1.65V" at 5196,4934 h30
  text "GND" at 5466,4933 h30
  text "Phase Shift Filtering" at 4656,4663 h30
  text "F2" at 4583,4589 h30
  text "F1" at 4285,4586 h30
  text "F3" at 4885,4586 h30
  text "F4" at 5184,4586 h30
  text "GND" at 5455,4586 h30
  text "PIC24" at 2061,4524 h30
  text "TOA Signal Conditioning" at 4592,4405 h30
  text "GND" at 5453,4336 h30
  text "Rect1" at 4577,4335 h30
  text "BPF2" at 4866,4335 h30
  text "Rect2" at 5168,4335 h30
  text "BPF1" at 4278,4333 h30
  text "Hydrophone Bank" at 4690,4141 h30
  text "GND" at 5445,4073 h30
  text "H2" at 4579,4072 h30
  text "H1" at 4285,4069 h30
  text "H3" at 4885,4069 h30
  text "H4" at 5181,4069 h30
  text "TX" at 5423,3885 h30
  text "RX" at 5416,3785 h30
  text "Primary Component Side" at 2268,3147 h30
  text "22" at 4154,3106 h30
  text "25" at 4454,3106 h30
  text "35" at 5534,2987 h30 r270
  text "1" at 2030,2940 h30
Bottom Overlay:
  lines w8: 2064,3250 5519,3250
  lines w10: 2065,3060 2065,3460 ; 5520,3060 5520,3460 ; 4256,4790 4312,4734 5512,4734 5570,4792 5570,4996 5512,5054 5512,5055 4312,5055 4256,4999 4256,4790 ; 4259,4524 4312,4471 5512,4471 5562,4521 5562,4665 5512,4715 5512,4717 4312,4717 4312,4716 4259,4663 4259,4524 ; 4262,4259 4312,4209 5512,4209 5560,4257 5560,4406 5512,4454 5512,4456 4312,4456 4312,4455 4262,4405 4262,4259 ; 4265,3995 4284,3976 5540,3976 5560,3996 5560,4147 5512,4195 4312,4195 4311,4195 4265,4149 4265,3995
  text "Power Bank" at 5074,5004 h30
  text "+5 V" at 4432,4938 h30
  text "-5 V" at 4727,4934 h30
  text "3.3 V" at 5042,4931 h30
  text "GND" at 5548,4931 h30
  text "1.65V" at 5332,4927 h30
  text "Phase Shift Filtering" at 5217,4664 h30
  text "F1" at 4326,4589 h30
  text "F3" at 4934,4589 h30
  text "F2" at 4629,4587 h30
  text "F4" at 5234,4587 h30
  text "GND" at 5536,4587 h30
  text "TOA Signal Conditioning" at 5257,4402 h30
  text "Rect2" at 5267,4333 h30
  text "GND" at 5539,4333 h30
  text "BPF1" at 4387,4331 h30
  text "Rect1" at 4671,4329 h30
  text "BPF2" at 4955,4329 h30
  text "Hydrophone Bank" at 5161,4139 h30
  text "H1" at 4329,4075 h30
  text "H3" at 4929,4075 h30
  text "H2" at 4631,4073 h30
  text "GND" at 5536,4071 h30
  text "H4" at 5229,4068 h30
  text "TX" at 5474,3886 h30
  text "RX" at 5468,3786 h30
  text "Secondary Component Side" at 3346,3144 h60
  text "49" at 4223,3107 h45
  text "46" at 4520,3107 h45
  text "70" at 2016,2940 h35 r270
  text "36" at 5534,2929 h35 r270